# EAGLE board  Relay and LED (EAGLE 9.7.0)

Size 165.44 x 83.59 mm. Coordinates in mm from the lower left corner, seen from the top.
Outline: 0,0 165.44,0 165.44,83.59 0,83.59 0,0
Copper layers (1*16): Top 0.035mm / dielectric 1.5mm / Bottom 0.035mm
Design rules "default": minimum track width 6mil, minimum drill 0.35mm, track to track 6mil, track to pad 6mil, pad to pad 6mil, via to via 6mil, smd to smd 6mil, copper to edge 40mil, drill to drill 6mil, minimum pad ring 10mil, minimum via ring 8mil, stop-mask expansion 4mil, vias tented up to drill 0mil, thermal gap 10mil

## Footprints (pad centres in the part's own frame; a part is rotated, then mirrored left to right if it is on the bottom)
LEDRD254W60D565H860B_O = drill 0.981 pad 1.581: 1 -1.27,0; 2 1.27,0
LU-5-R = drill 0.8: 1 -6.35,-3.81; 5 3.81,-3.81; 6 6.35,-3.81; 7 6.35,3.81; 8 3.81,3.81; 12 -6.35,3.81
1X02 = drill 1.016 long: 1 -1.27,0; 2 1.27,0
BATTERY-GENERIC = drill 1.118 pad 3.15 octagon: + 2.54,0; - -2.54,0
RESAD1016W63L850D250B = drill 0.83 pad 1.43: 1 -5.08,0; 2 5.08,0
ARDUINO-UNO-R3-SHIELD = drill 1.016 pad 1.88: 3.3V 24.13,-2.54; 5V 24.13,0; A0 24.13,12.7; A1 24.13,15.24; A2 24.13,17.78; A3 24.13,20.32; A4 24.13,22.86; A5 24.13,25.4; AREF -24.13,-13.97; D2 -24.13,20.32; D3 -24.13,17.78; D4 -24.13,15.24; D5 -24.13,12.7; D6 -24.13,10.16; D7 -24.13,7.62; D8 -24.13,3.81; D9 -24.13,1.27; D10 -24.13,-1.27; D11 -24.13,-3.81; D12 -24.13,-6.35; D13 -24.13,-8.89; GND@0 24.13,2.54; GND@1 24.13,5.08; GND@2 -24.13,-11.43; IOREF 24.13,-7.62; NC 24.13,-10.16; RES 24.13,-5.08; RX -24.13,25.4; SCL -24.13,-19.05; SDA -24.13,-16.51; TX -24.13,22.86; VIN 24.13,7.62

## Placement (x,y rotation side)
DLED  ORANGE  [LEDRD254W60D565H860B_O]  103.19,24.95 180 top
K1  RELAY-SPDT_LU-5-R  [LU-5-R]  120.97,26.22 180 top
L1  LIGHTBULB  [1X02]  103.47,71.11 0 top
P1  BATTERYGENERIC  [BATTERY-GENERIC]  157.19,75.34 180 top
R1  1k  [RESAD1016W63L850D250B]  101.92,17.33 90 top
UUNO  ARDUINO-UNO-R3-SHIELD  [ARDUINO-UNO-R3-SHIELD]  47.88,29.84 270 top

## Library data of the parts
DLED = Tinkercad; CATEGORY: Opto-Electronic; SUB-CATEGORY: LED; VALUE: LED_ORANGE
K1 L1 P1 R1 UUNO = Tinkercad

## Nets
DLED_A: DLED.1 K1.6 K1.7 L1.1
DLED_C: DLED.2 R1.2
K1_COIL1: K1.5 K1.8
P1+: L1.2 P1.+
P1-: K1.1 K1.12 P1.- UUNO.D11
UUNO_GND: R1.1 UUNO.GND@0 UUNO.GND@1 UUNO.GND@2

## Tracks (layer width: path | path; a pad name or v marks a point on that pad's centre or on a via)
DLED_A  (3 unrouted)
DLED_C  (1 unrouted)
K1_COIL1  (1 unrouted)
P1+  (1 unrouted)
P1-  (3 unrouted)
UUNO_GND  (3 unrouted)